# Altium PCB R1250GSA Foglamp Swith (v2.0).PcbDoc
Units mm, origin at the board's own origin, x right, y up, seen from the top; angles counter-clockwise.
Board outline 66.99 x 39 mm, 2 copper layers (Top Layer, Bottom Layer); 19 components, 16 nets, 50 pads, 2 vias.
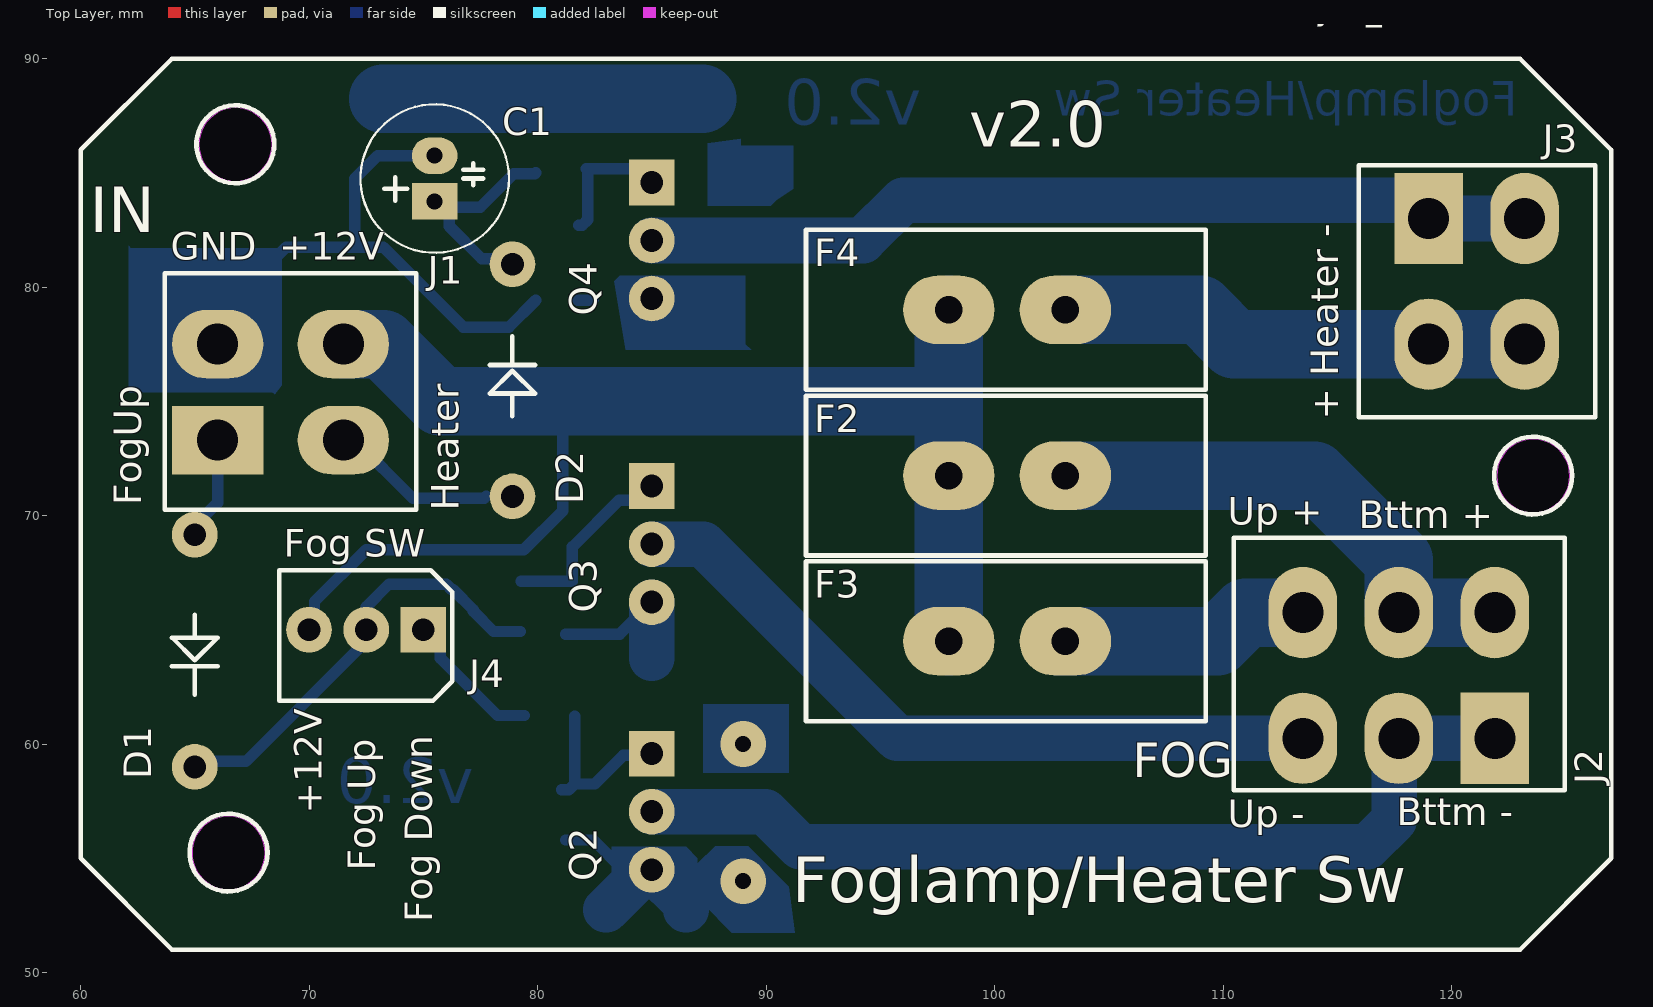
[diagram p0: Top Layer view]
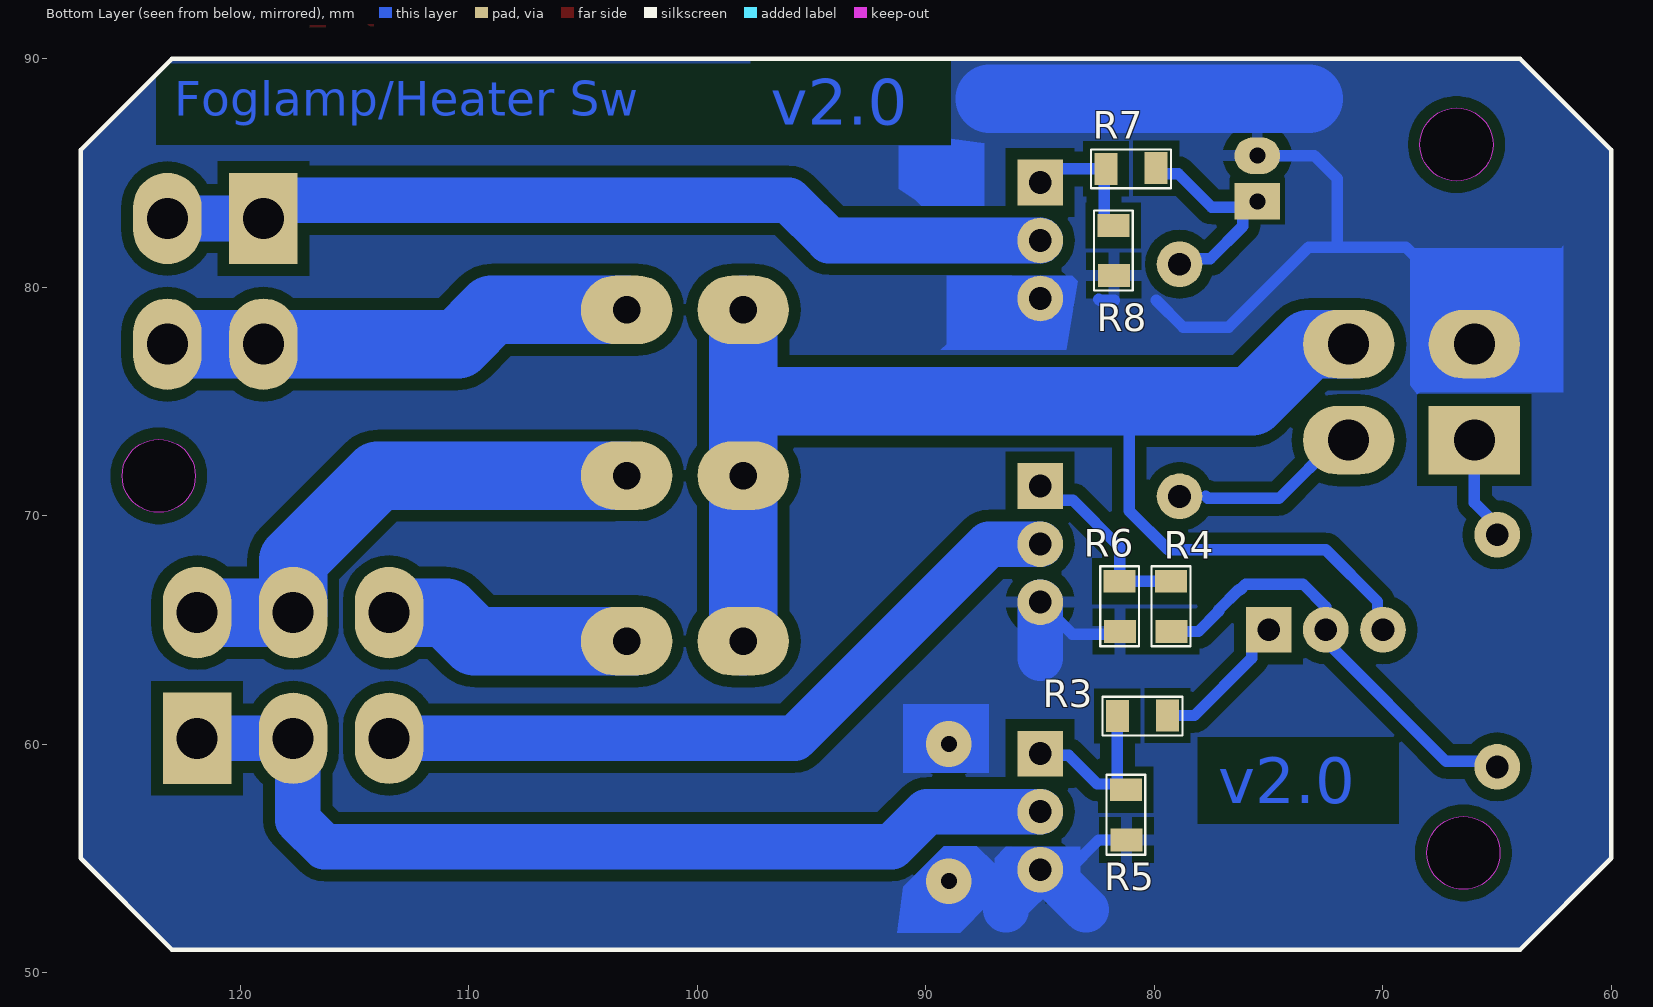
[diagram p1: Bottom Layer view, seen from below]
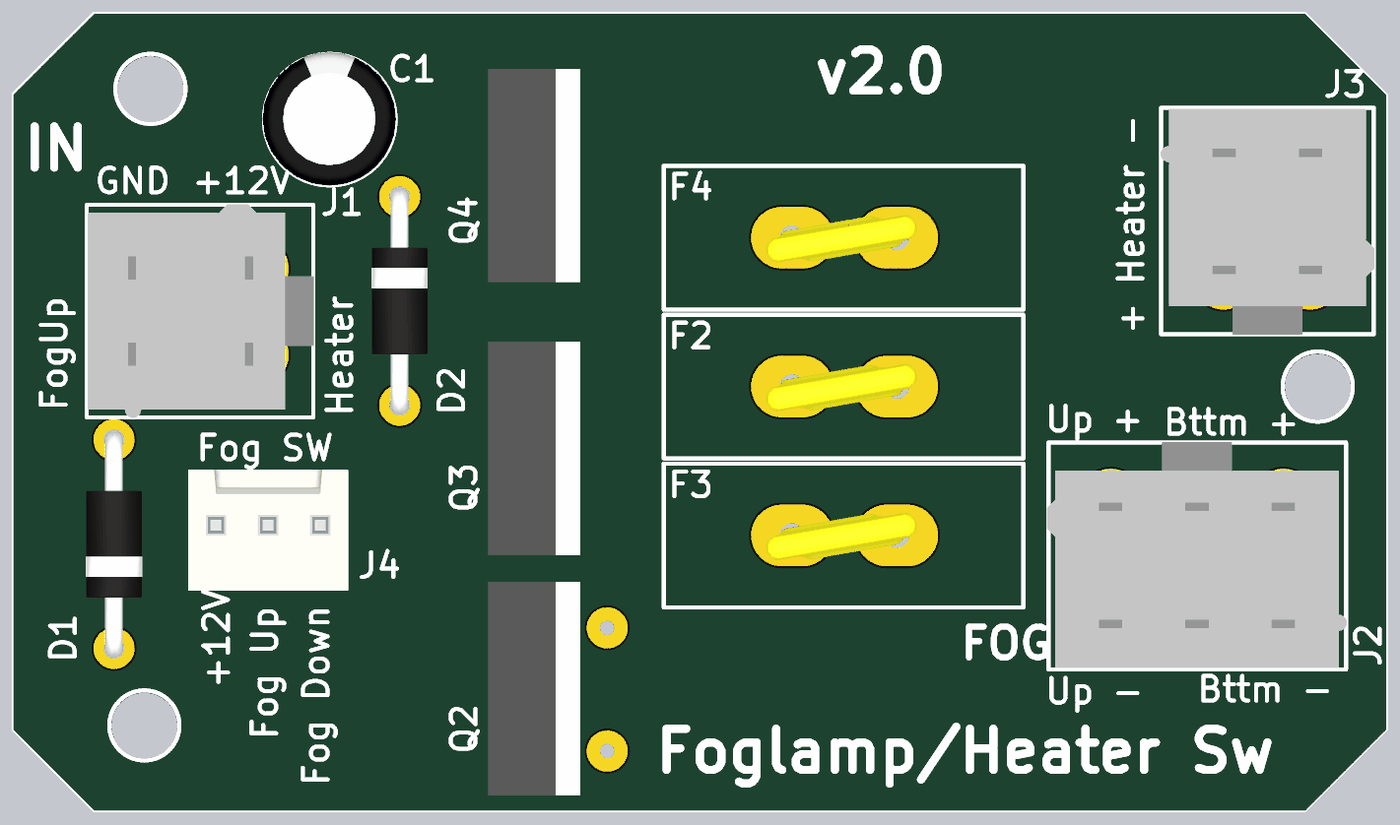
[diagram p2: 3D render of the assembled board from above, using the file's embedded part models]
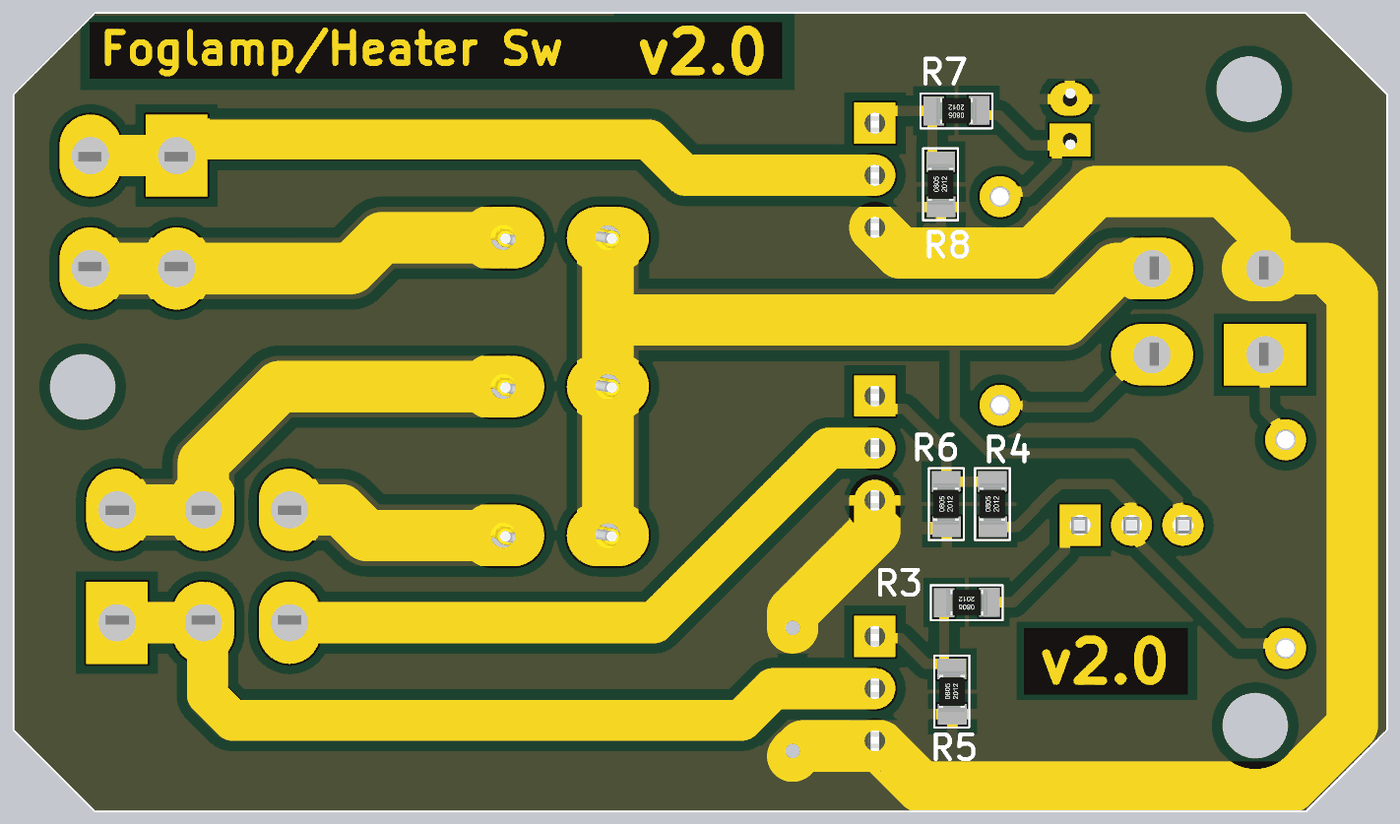
[diagram p3: 3D render of the assembled board from below, using the file's embedded part models]

## Layer stack, top to bottom
Top Solder: solder mask 0.0102, Solder Resist, Dk 3.5
Top Layer: signal copper 0.0356
Dielectric 1: dielectric 0.32, FR-4, Dk 4.8
Bottom Layer: signal copper 0.0356
Bottom Solder: solder mask 0.0102, Solder Resist, Dk 3.5

## Board outline
60.006,55 60.006,86 60.006,86.006 64,90 123,89.998 123,90 127,86 127,55 123,51 64,51
cut-out: 121.978,71.738 ccw(c123.578,71.738) 123.578,70.138 ccw(c123.578,71.738) 125.178,71.738 ccw(c123.578,71.738) 123.578,73.338 ccw(c123.578,71.738)
cut-out: 64.878,55.238 ccw(c66.478,55.238) 66.478,53.638 ccw(c66.478,55.238) 68.078,55.238 ccw(c66.478,55.238) 66.478,56.838 ccw(c66.478,55.238)
cut-out: 65.178,86.238 ccw(c66.778,86.238) 66.778,84.638 ccw(c66.778,86.238) 68.378,86.238 ccw(c66.778,86.238) 66.778,87.838 ccw(c66.778,86.238)

## Design rules (kind name [scope] priority, off if disabled: settings)
Clearance Clearance_1 [InComponent('C1')] p1: gap=0.2 ignorepadtopadclearanceinfootprint=FALSE
Clearance [All] p2: gap=0.5 ignorepadtopadclearanceinfootprint=FALSE
ComponentClearance [All] p1: gap=0.01 collisioncheckmode=3 verticalgap=0.2 showdistances=FALSE
Height [All] p1: minheight=0 maxheight=25 prefheight=12.7
HoleSize [All] p1: absolutevalues=TRUE maxlimit=3.2 minlimit=0.4 maxpercent=80.000 minpercent=20.000
HoleToHoleClearance [All] p1: gap=0.2 allowstackedmicrovias=TRUE
PlaneClearance [All] p1: clearance=1
PlaneConnect [All] p1: planeconnectstyle=Relief reliefexpansion=0.508 reliefentries=4 reliefconductorwidth=0.5 reliefairgap=0.5
PolygonConnect [All] p1: connectstyle=Relief reliefconductorwidth=0.5 reliefentries=4 polygonreliefangle="90 Angle" airgapwidth=0.5
RoutingVias [All] p1: holewidth=0.7 width=1.5 viastyle="Through Hole" minholewidth=0.4 minwidth=0.4 maxholewidth=3.2 maxwidth=7
SilkToSilkClearance [All] p1: silktosilkclearance=0.05
SilkToSolderMaskClearance [IsPad] p1: minsilkscreentomaskgap=0.2 clearancetoexposedcopper=TRUE
SolderMaskExpansion [All] p1: expansion=0.1 istentingtop=FALSE
Width [All] p1: maxlimit=3 minlimit=0.2 preferedwidth=0.5
22 further rules are at their usual default settings.

## Components (designator, comment, footprint, x,y, rotation, side; value= is the part's Value field where it differs from the comment)
C1 "47uF 25V" "Cap E p2mm D6.5xH11" 75.5,83.75 r90 top
D1 "Shotki N5819" "Diode DO-41" 65,69.16 r270 top value=1N5822
D2 "Shotki N5819" "Diode DO-41" 78.9,70.84 r90 top value=1N5822
F2 "5A" "Fuse RGE1100" 98,71.75 r90 top
F3 "5A" "Fuse RGE1100" 98,64.5 r90 top
F4 "5A" "Fuse RGE1100" 98,79 r90 top
J1 "connector" "Molex Mini-Fit Jr - 4Pin V" 66,77.5 r0 top
J2 "connector" "Molex Mini-Fit Jr - 6Pin V" 113.5,60.25 r90 top
J3 "connector" "Molex Mini-Fit Jr - 4Pin V" 123.2,83 r270 top
J4 "Handlebar Switch" WF-3 75,65 r270 top
Q2 "IRF3205 PBf" TO220-2 85,59.58 r180 top
Q3 "IRF3205 PBf" TO220-2 85,71.29 r180 top
Q4 "IRF3205 PBf" TO220-2 85,84.58 r180 top
R3 "1 kOm" "SMD 0805 (2012)" 79.5,61.25 r0 bottom
R4 "1 kOm" "SMD 0805 (2012)" 79.25,65 r90 bottom
R5 "10k Om" "SMD 0805 (2012)" 81.225,55.875 r90 bottom
R6 "10k Om" "SMD 0805 (2012)" 81.5,65 r90 bottom
R7 "1 kOm" "SMD 0805 (2012)" 80,85.2 r0 bottom
R8 "20k Om" "SMD 0805 (2012)" 81.775,80.575 r90 bottom

## Footprints (in the part's own frame and the unit in brackets; to place one, negate y for a bottom-side part, rotate by r counter-clockwise, add the part's x,y. Pads: shape width x height; smd on the part's side, far side on the other; paste and mask are expansions set on the pad)
"Cap E p2mm D6.5xH11" [mm] "D 6.5mm; H 11mm"
  rect 1.6x2 hole 0.7: 1(0,0)
  oval 1.6x2 hole 0.7: 2(2,0)
  silkscreen extent -2.25,-3.25 4.25,3.25, body extent -2.22,-3.22 4.27,3.28, height 11.49
"Diode DO-41" [mm] "p10.16mm"
  round 2 hole 1: A(0,0) K(10.16,0)
  silkscreen extent 3.5,-1 7,1, body extent -0.43,-1.37 10.59,1.37, height 2.73
"Fuse RGE1100" [mm] "Resettable 11A"
  oval 3x4 hole 1.2: 1(0,0) 2(0,-5.1)
  silkscreen extent -3.5,-11.25 3.5,6.25, body extent -1.53,-6.19 1.43,1.39, height 15
"Molex Mini-Fit Jr - 4Pin V" [mm] "Molex Mega-Fit"
  rect 4x3 hole 1.8: 1(0,-4.2)
  oval 4x3 hole 1.8: 2(0,0) 3(5.5,-4.2) 4(5.5,0)
  silkscreen extent -2.32,-7.25 8.7,3.1, body extent -2.27,-7.27 8.73,3.12, height 12.8
"Molex Mini-Fit Jr - 6Pin V" [mm] "Molex Mega-Fit"
  rect 4x3 hole 1.8: 1(0,-8.4)
  oval 4x3 hole 1.8: 2(0,-4.2) 3(0,0) 4(5.5,-8.4) 5(5.5,-4.2) 6(5.5,0)
  silkscreen extent -2.27,-11.45 8.77,3.03, body extent -2.2,-11.5 8.8,3.1, height 12.8
"SMD 0805 (2012)" [mm]
  rect 1x1.4 smd: 1(-0.075,0) 2(2.125,0.025)
  silkscreen extent -0.72,-0.82 2.78,0.87, body extent 0.03,-0.6 2.03,0.65, height 0.45
TO220-2 [mm]
  rect 2x2 hole 1: 1(0,0)
  round 2 hole 1: 2(0,2.54) 3(0,5.08)
  body extent -2.7,-2.65 1.8,7.75, height 19
WF-3 [mm]
  rect 2x2 hole 1: 1(0,0)
  round 2 hole 1: 2(0,-2.5) 3(0,-5)
  silkscreen extent -2.6,-6.3 3.1,1.27, body extent -2.7,-6.4 3.2,1.4, height 11.73

## Part data
C1: library part "Cap Elecrolitic", "Capacitor"
D1 D2: library part "D Shotki All", "Shotki  Diode", PackageReference=DO-201
F2 F3 F4: library part Fuse, "Round fuse"
J1 J3: library part "Molex Mini-Fit Jr - 4 pin", "Right, Dbl line, Female"
J2: library part "Molex Mini-Fit Jr - 6 pin", "Right, Dbl line, Female"
J4: library part WF-3, "Standart Fan MB's Connector"
Q2 Q3 Q4: library part IRF3205, "N-Channel 55V - 0.008Ω - 110A", I d - Drain current (continuous) at TC = 25°C="110 A", I d - Drain current (continuous) at TC = 100°C="80 A", C ISS Входная емкость="3247 pF", C OSS Выходная емкость="781 pF", DataSheet=http://tec.org.ru/_bd/2/223_IRF3205.pdf, Monufacturer=IOR, Name="IRF3205 PBf", RDS Сопротивление Сток-Исток="0.008 Om", URL=http://tec.org.ru/board/49-1-0-223, V DSS (v)=55V, VGS Макс напр на гейте="+-20 V", VGS Порог Открытия="+2....+4 V"
R3 R4 R5 R6 R7 R8: library part "Res All Types"

## Via types
v1: diameter 2, hole 0.7, Top Layer to Bottom Layer, 2 vias

## Nets (pads, with @x,y where several pads share a name; then routed paths per layer and width w, separated by ;. In a path a pad name is that pad's centre, name@x,y a point inside that pad or via, vN(x,y) a via of type N, cw(c..) or ccw(c..) an arc to the next point about the centre after c; other vN are vias at no path point)
"+12 Fog Bottom": F2.2 J2.4 J2.5 | length 21.3
  Bottom Layer w3: F2.2 103.6,71.75 114,71.75 117.7,68.05 J2.5 ; J2.5@119,65.75 J2.4
"+12 Fog Up": F3.2 J2.6 | length 11.3
  Bottom Layer w3: F3.2@102.75,64.5 F3.2 109.75,64.5 111,65.75 J2.6
"+12V No Noise": F2.1 F3.1 F4.1 J1.4 J4.3 | length 60.4
  Bottom Layer w0.5: J4.3 70.237,65.237 70.237,66.237 72.5,68.5 79.4,68.5 81.1,70.2 81.1,75
  Bottom Layer w3: J1.4 73.25,77.5 75.75,75 81.1,75 97.75,75 ; F3.1 F2.1 F4.1
GND: C1.2 J1.2 Q2.3 Q3.3 Q4.3 R5.1 R6.1 R8.1 | length 54.9
  Bottom Layer w0.5: J1.2@66,78.5 66,78.676 67.685,80.362 67.685,80.435 69,81.75 72,81.75 ; C1.2 73,85.75 72,84.75 72,81.75 ; 79.925,79.425 78.75,78.25 76.75,78.25 73.25,81.75 72,81.75 ; R5.1 82.45,55.8 83.75,54.5 Q2.3@84.75,54.5 ; R6.1@81.225,64.8 83.59,64.8 Q3.3 ; 81.75,79.425 82.4,79.425 82.438,79.463
  Bottom Layer w2: 83,52.75 84.75,54.5 Q2.3 86.5,53 86.5,52.75 ; 85,63.75 Q3.3
  Bottom Layer w3: 73.25,88.25 87.2,88.25
  other v1: 89,54 89,60
"GND Fog Bottom": J2.1 J2.2 Q2.2 | length 41.6
  Bottom Layer w2: Q2.2 89.96,57.04 91.5,55.5 116.324,55.5 117.496,56.672 117.496,58.839 117.509,58.852 117.509,60.237 117.496,60.25 J2.1
"GND Fog Up": J2.3 Q3.2 | length 32
  Bottom Layer w2: Q3.2 87.25,68.75 95.75,60.25 J2.3
"GND Heater": J3.1 J3.2 Q4.2 | length 38.9
  Bottom Layer w2: Q4.2 94.24,82.04 96,83.8 118,83.8 118.5,83.3 118.5,83 J3.2@122.7,83
"Heater IN": D2.A J1.3 | length 7.3
  Bottom Layer w0.5: J1.3 72,73.3 74.55,70.75 77.66,70.75 77.75,70.84
NetC1_1: C1.1 D2.K R7.1 | length 8.7
  Bottom Layer w0.5: D2.K@78.4,80.9 78.053,81.247 77.553,81.247 76.136,82.664 76.136,83.2 75.836,83.5 77.5,83.5 78.968,84.968 79.889,84.968 R7.1@79.921,85
NetF4_2: F4.2 J3.3 J3.4 | length 20.2
  Bottom Layer w3: F4.2 109,79 110.5,77.5 J3.3 J3.4@122.7,77.5
NetQ2_1: Q2.1 R3.2 R5.2 | length 7.6
  Bottom Layer w0.5: R5.2@81.05,58 R5.2 81.375,58 R5.2@81.625,58.25 ; R3.2 R5.2@81.625,58.25 ; Q2.1 84.92,59.5 83.75,59.5 82.5,58.25 R5.2@81.625,58.25
NetQ3_1: Q3.1 R4.2 R6.2 | length 8.3
  Bottom Layer w0.5: R4.2 R6.2 81.525,68.625 83.565,70.665 84.375,70.665 Q3.1
NetQ4_1: Q4.1 R7.2 R8.2 | length 6
  Bottom Layer w0.5: R8.2 81.95,82.7 82.2,82.95 82.2,85.1 R7.2 84.405,85.175 Q4.1 Q4.1@84.895,84.475
"Sw Fog Bottom": J4.1 R3.1 | length 6.4
  Bottom Layer w0.5: J4.1@74.75,64.75 75.25,64.75 75.75,64.25 75.75,63.75 78.25,61.25 R3.1
"Sw Fog Up": D1.K J4.2 R4.1 | length 19.3
  Bottom Layer w0.5: D1.K 65.237,59.237 67.237,59.237 72.213,64.213 72.213,64.713 J4.2 72.5,66 73.5,67 76,67 76.25,66.75 76.311,66.75 77.193,65.868 77.193,65.807 78.075,64.925 R4.1
"Sw Fog Up IN": D1.A J1.1 | length 4.6
  Bottom Layer w0.5: D1.A 65,69.566 66,70.566 J1.1

## Polygon pours and split planes (outlines as drawn)
GND on Bottom Layer "GND_L02_P003" (solid, pour order 3): 64,51 123,51 127,55 127,86 123,90 64,90 60,86 60,55
no net on Bottom Layer "NONET_L02_P000" (solid, pour order 0): 65,52

## Other copper
Top Layer:
  text ".Layer_Name" at 111.975,91.7 h1
Bottom Layer:
  region net GND: 68.8,75.7 68.8,81.7 62.2,81.7 62.1,81.8 62.1,75.4 68.4,75.4 68.5,75.3
  region net GND: 86.5,55.5 83.25,55.5 83.25,53.5 87,53.5 87,55
  region net GND: 90.45,83.8 90.2,83.55 87.45,83.55 87.45,86.3 88.9,86.488 88.9,86.194 91.2,86.194 91.2,84.3
  region net GND: 83.85,77.25 89.35,77.25 89.1,77.5 89.1,80.5 83.6,80.5 83.35,80.25
  region net GND: 91,53.75 89.217,55.533 87.783,55.533 87,54.75 87,53 87.25,53 88.5,51.75 91.25,51.75
  region net GND: 91,58.75 91,61.75 87.25,61.75 87.25,58.75
  text ".Layer_Name" at 75,92 h1
  text "Foglamp/Heater Sw" at 122.9,87.5 h1.5
  text "v2.0" at 96.8,87.1 h2
  text "v2.0" at 77.2,57.4 h2

## Silkscreen, mask and mechanical layers (free items; w line width, h text height)
Top Overlay:
  circle w0.2: c123.575,71.75 r1.706
  circle w0.2: c66.475,55.25 r1.706
  circle w0.2: c66.775,86.25 r1.706
  lines w0.2: 60.006,54.998 60.006,54.994 64,51 123,51 127,55 127,86 123,90 ; 60.006,55 60.006,86 60.006,86.006 64,90 123,89.998
  text ".Layer_Name" at 111.975,91.7 h1
  text "v2.0" at 98.9,86.15 h2
  text "IN" at 60.4,82.4 h2
  text "GND" at 63.95,81.2 h1.2
  text "+12V" at 68.7,81.2 h1.2
  text "+ Heater -" at 115.05,74.2 h1.2 r90
  text "FogUp" at 62.65,70.45 h1.2 r90
  text "Heater" at 76.55,70.2 h1.2 r90
  text "Up +" at 110.2,69.6 h1.2
  text "Bttm +" at 115.95,69.45 h1.2
  text "Fog SW" at 68.9,68.2 h1.2
  text "FOG" at 106.05,58.55 h1.5
  text "+12V" at 70.55,56.95 h1.2 r90
  text "Bttm -" at 117.596,56.45 h1.2
  text "Up -" at 110.2,56.35 h1.2
  text "Fog Up" at 72.9,54.45 h1.2 r90
  text "Foglamp/Heater Sw" at 91.15,53.066 h2
  text "Fog Down" at 75.4,52.2 h1.2 r90
Bottom Overlay:
  lines w0.2: 60,55 64,51 123,51 127,55 127,86 123,90 64,90 60,86 60,55
  text ".Layer_Name" at 75,92 h1
Top Solder:
  text ".Layer_Name" at 111.975,91.7 h1
Bottom Solder:
  region: 123.25,86.75 89.5,86.75 89.5,89.5 123.25,89.5
  region: 77.75,56.75 77.75,60 69.75,60 69.75,56.75
  lines w2: 85,57.04 89.96,57.04 91.5,55.5 116.25,55.5 117.5,56.75 117.5,58.75 117.7,58.95 117.7,60.25 121.9,60.25 ; 85,68.75 87.25,68.75 95.75,60.25 113.5,60.25 ; 85,82.04 94.29,82.04 96,83.75 118.25,83.75 119,83 123.2,83
  lines w2.5: 71.5,77.5 73.25,77.5 75.75,75 98,75 ; 85,66.21 85,64.75 89,60.75 89,60 ; 85,79.5 83.75,78.25 77.25,78.25 74.25,81.25 68,81.25 66,79.25 66,77.5 63,77.5 61.75,76.25 61.75,55.25 64.75,52.25 82.75,52.25 84.75,54.25 88.5,54.25 89,53.75 ; 98,64.5 98,79 ; 103.1,64.5 109.75,64.5 111,65.75 113.5,65.75 ; 103.1,71.75 114,71.75 117.7,68.05 117.7,65.75 121.9,65.75 ; 103.1,79 109,79 110.5,77.5 123.2,77.5
  text ".Layer_Name" at 75,92 h1
Mechanical 2:
  text "67 x 39 mm" at 61,95.25 h1
  text "T O P" at 113.7,94 h2.7
  text "G1015 / G1017 Masterkit Case" at 60.975,93.475 h1
  text ".Pcb_File_Name_No_Path" at 60.925,91.425 h1
Mechanical 3:
  text "67 x 39 mm" at 127,95.25 h1
  text "T O P" at 74.3,94 h2.7
  text "G1015 / G1017 Masterkit Case" at 126.975,93.475 h1
  text ".Pcb_File_Name_No_Path" at 126.925,91.425 h1

## Dimensions
60,51 to 127,51 on Mechanical 3
60,90 to 60,51 on Mechanical 3
60,90 to 60,51 on Mechanical 2
60,51 to 127,51 on Mechanical 2